# EAGLE board RatDistortion (EAGLE 9.6.2)
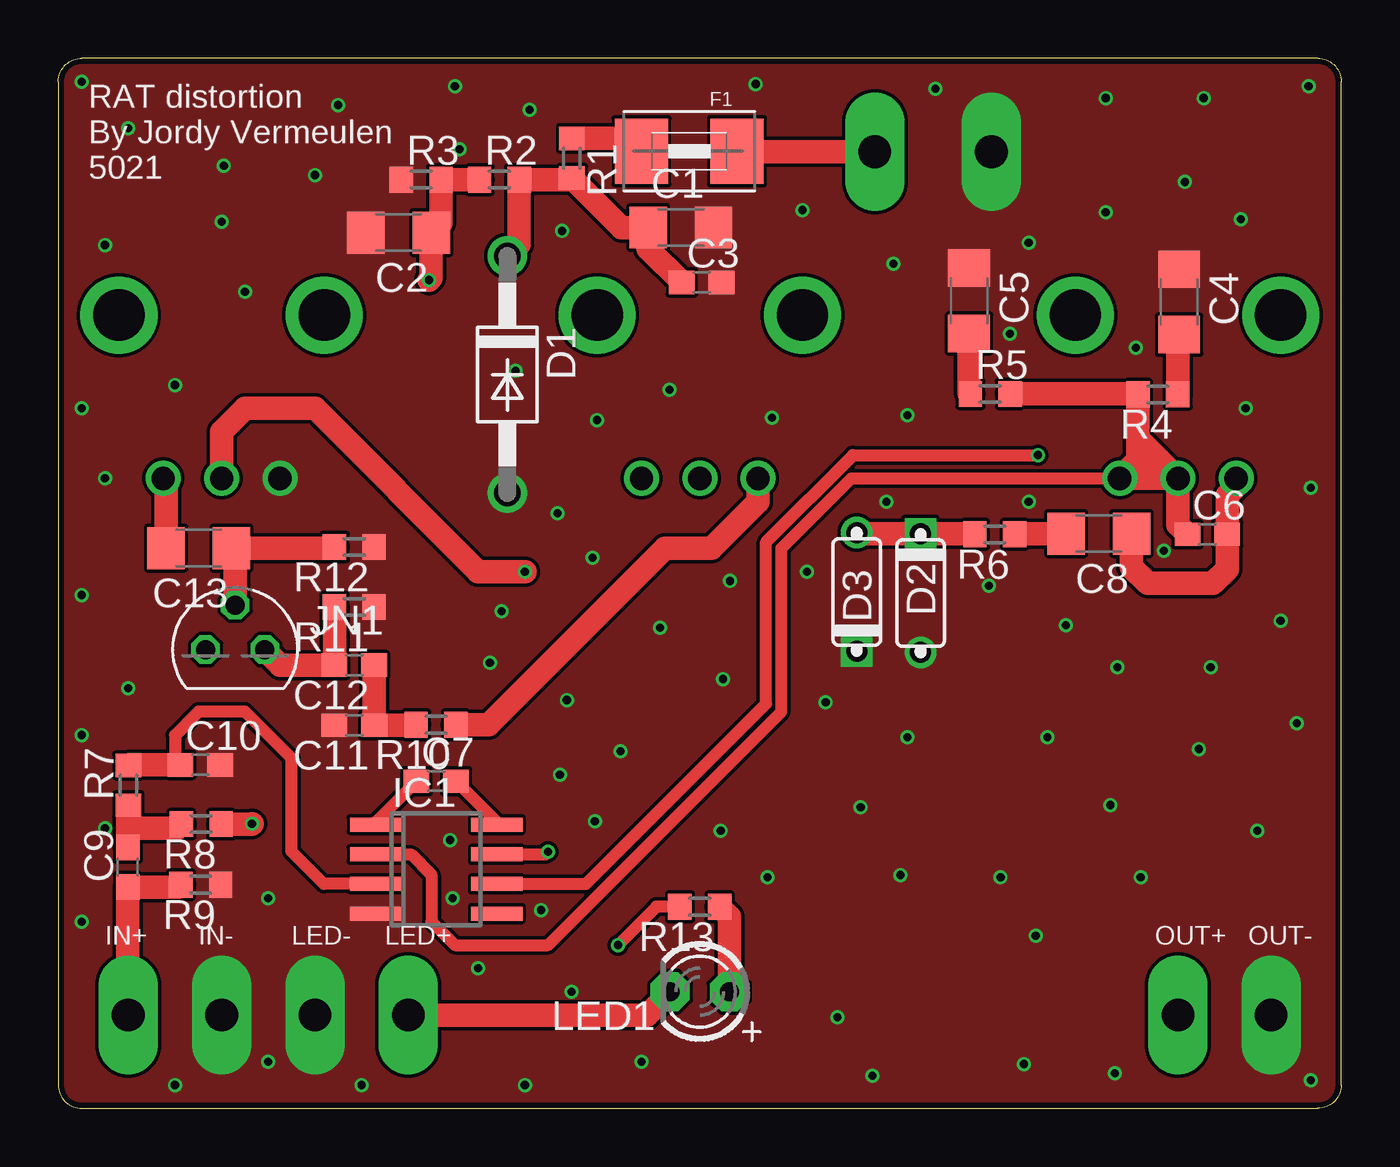
[diagram p0: board, top side]
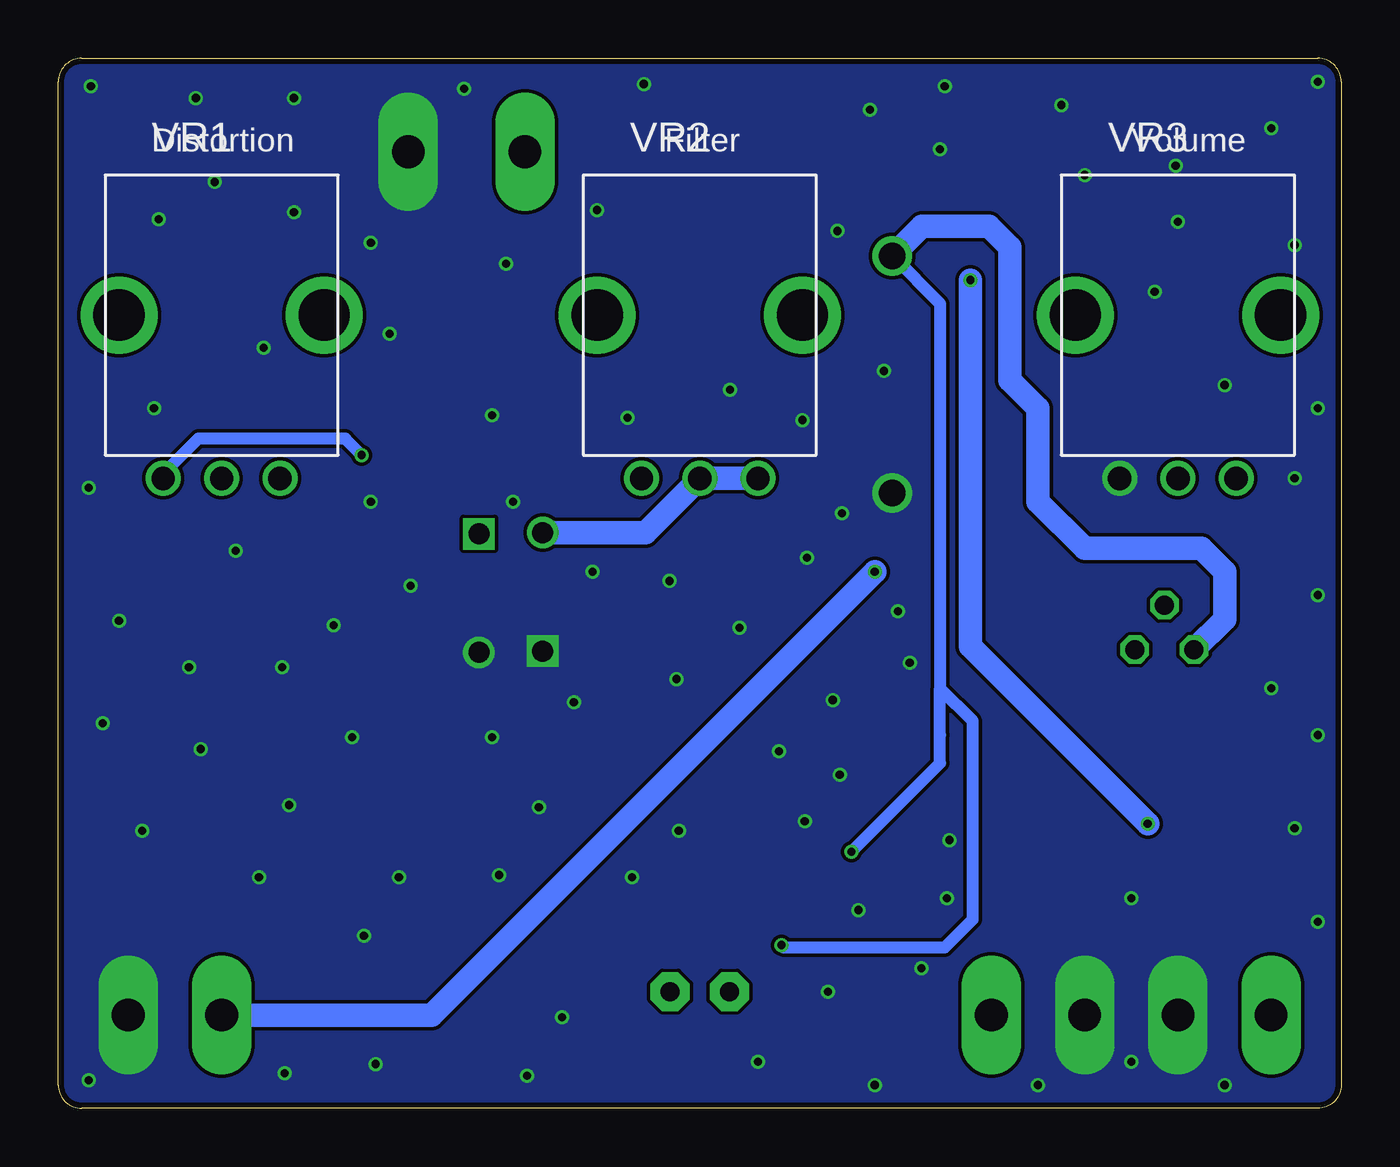
[diagram p1: board, bottom side, seen from below]

Size 55 x 45 mm. Coordinates in mm from the lower left corner, seen from the top.
Outline: 1,0 54,0 arc90 55,1 55,44 arc90 54,45 1,45 arc90 0,44 0,1 arc90 1,0
Copper layers (1*16): Top 0.018mm / dielectric 1.55mm / Bottom 0.018mm
Design rules "eC_2Layer_PClass6_BaseCopperO18_eCDefault": minimum track width 0.15mm, minimum drill 0.35mm, track to track 0.15mm, track to pad 0.15mm, pad to pad 0.15mm, via to via 0.15mm, smd to smd 0mil, copper to edge 0.25mm, drill to drill 0.35mm, minimum pad ring 0.175mm, minimum via ring 0.125mm, stop-mask expansion 0mil, vias tented up to drill 0.45mm, thermal gap 0.2mm

## Footprints (pad centres in the part's own frame; a part is rotated, then mirrored left to right if it is on the bottom)
C1206 = smd 1.6 x 1.8: 1 -1.4,0; 2 1.4,0
C0603 = smd 1.1 x 1: 1 -0.85,0; 2 0.85,0
DO41-10 = drill 1.118: A 5.08,0; C -5.08,0
DO35-2 = drill 0.9: A 2.54,0 | drill 0.9 square: C -2.54,0
1812 = smd 2.286 x 2.794: 1 -2.046,0; 2 2.046,0
SO08 = smd 0.6 x 2.2: 1 -1.905,-2.6; 2 -0.635,-2.6; 3 0.635,-2.6; 4 1.905,-2.6; 5 1.905,2.6; 6 0.635,2.6; 7 -0.635,2.6; 8 -1.905,2.6
TO92 = drill 0.813 octagon: 1 1.27,0; 2 0,1.905; 3 -1.27,0
1X1-BIGPOGO = drill 1.4 pad 2.54 long: P$1 0,0
LED3MM = drill 0.813 pad 1.676 octagon: A -1.27,0; K 1.27,0
R0603 = smd 1 x 1.1: 1 -0.85,0; 2 0.85,0
PTV09 = drill 1: 1 -2.5,0; 2 0,0; 3 2.5,0 | drill 2.2: NC1 -4.4,7; NC2 4.4,7

## Placement (x,y rotation side)
C1  100u  [C1206]  26.69,37.75 0 top
C2  1u  [C1206]  14.59,37.53 180 top
C3  0.1u  [C0603]  27.58,35.4 0 top
C4  2.2u  [C1206]  48.05,34.56 270 top
C5  4.7u  [C1206]  39.05,34.61 270 top
C6  100p  [C0603]  49.26,24.6 0 top
C7  30p  [C0603]  16.2,14.02 0 top
C8  4.7u  [C1206]  44.61,24.63 180 top
C9  22n  [C0603]  2.98,10.33 90 top
C10  1n  [C0603]  6.09,14.72 0 top
C11  3.3n  [C0603]  12.69,16.42 180 top
C12  22n  [C0603]  12.69,19 180 top
C13  1u  [C1206]  6.02,24.01 180 top
D1  1N4004  [DO41-10]  19.25,31.45 270 top
D2  1N914.2  [DO35-2]  36.97,22.08 270 top
D3  1N914.2  [DO35-2]  34.23,22.13 90 top
F1  100mA  [1812]  27.05,41.02 180 top
IC1  LM308D  [SO08]  16.2,10.25 270 top
JN1  2N5458  [TO92]  7.58,19.66 0 top
JP1  9v  [1X1-BIGPOGO]  35,41 90 top
JP2  GND  [1X1-BIGPOGO]  52,4 90 top
JP3  [1X1-BIGPOGO]  3,4 90 top
JP4  [1X1-BIGPOGO]  7,4 90 top
JP5  [1X1-BIGPOGO]  48,4 90 top
JP6  [1X1-BIGPOGO]  40,41 90 top
JP7  [1X1-BIGPOGO]  15,4 270 bottom
JP8  [1X1-BIGPOGO]  11,4 90 top
LED1  [LED3MM]  27.5,5 180 top
R1  47  [R0603]  22.02,40.72 270 top
R2  100k  [R0603]  18.91,39.8 0 top
R3  100k  [R0603]  15.56,39.8 0 top
R4  47  [R0603]  47.14,30.6 180 top
R5  560  [R0603]  39.95,30.62 0 top
R6  1k  [R0603]  40.15,24.6 180 top
R7  1k  [R0603]  3,13.84 90 top
R8  1M  [R0603]  6.13,12.18 180 top
R9  1M  [R0603]  6.11,9.58 180 top
R10  1.5k  [R0603]  16.19,16.44 180 top
R11  1M  [R0603]  12.69,21.48 180 top
R12  10k  [R0603]  12.69,24.06 180 top
R13  1k  [R0603]  27.5,8.64 180 top
VR1  PTV09A-4225F-B104  [PTV09]  48,27 0 bottom
VR2  PTV09A-4225F-B104  [PTV09]  27.5,27 0 bottom
VR3  PTV09A-4225F-B104  [PTV09]  7,27 0 bottom

## Library data of the parts
C1-C13 = rcl; SPICEPREFIX: C
D1 = diode
D2 D3 = 1N914; AVAILABILITY: In Stock; DESCRIPTION: Diode Standard 75V 200mA Surface Mount SOD-523F; MF: ON Semiconductor; MP: 1N914; PACKAGE: AXIAL LEAD-2 ON Semiconductor; PRICE: None; PURCHASE-URL: https://pricing.snapeda.com/search/part/1N914/?ref=eda
F1 JP1-JP8 LED1 = adafruit
IC1 = linear
JN1 = 2N5458; AVAILABILITY: In Stock; DESCRIPTION: JFET N-Channel 25 V 310 mW Through Hole TO-92 (TO-226); MF: ON Semiconductor; MP: 2N5458; PACKAGE: E-PKG AXIAL-LEADED-2 ON Semiconductor; PRICE: None
R1-R13 = rcl; SPICEPREFIX: R
VR1-VR3 = PTV09A-4225F-B104; AVAILABILITY: In Stock; DESCRIPTION: 100k Ohm 1 Gang Linear Through Hole, Snap In Potentiometer Detent 1.0 Kierros Carbon 0.05W, 1/20W PC Pins, Board Locks; MF: Bourns; MP: PTV09A-4225F-B104; PACKAGE: None; PRICE: None; PURCHASE-URL: https://pricing.snapeda.com/search/part/PTV09A-4225F-B104/?ref=eda

## Nets
4.5V: C2.1 R2.1 R3.2 R8.1
9V: C1.1 C3.1 D1.C IC1.7 JN1.3 R1.2 R2.2 R13.2
GND: C1.2 C2.2 C3.2 C4.1 C5.1 C10.2 C11.2 D1.A D2.A D3.C IC1.4 JP2.P$1 JP4.P$1 JP6.P$1 JP8.P$1 R3.1 R9.1 R11.1 R12.1 VR3.1
N$1: F1.2 R1.1
N$2: F1.1 JP1.P$1
N$3: C4.2 R4.1
N$4: C5.2 R5.1
N$5: C6.1 IC1.2 R4.2 R5.2 VR1.2 VR1.3
N$6: C6.2 C8.1 IC1.6 VR1.1
N$7: C8.2 R6.1
N$8: C12.2 JN1.1 R11.2
N$9: C7.1 IC1.1
N$10: C7.2 IC1.8
N$12: C10.1 IC1.3 R7.2
N$13: C9.2 R7.1 R8.2
N$14: C9.1 JP3.P$1 R9.2
N$16: R10.1 VR2.1
N$17: C13.1 JN1.2 R12.2
N$18: C13.2 VR3.3
N$19: LED1.A R13.1
N$20: JP5.P$1 VR3.2
N$21: JP7.P$1 LED1.K
OUTSTAGE: C11.1 C12.1 R10.2
TONE: D2.C D3.A R6.2 VR2.2 VR2.3

## Tracks (layer width: path | path; a pad name or v marks a point on that pad's centre or on a via)
4.5V  (via drill 0.35)
  Top 1.016: R2.1 R3.2 16.41,37.95 C2.1 15.99,35.59 v15.9,35.5 | R8.1 8.28,12.18 v8.3,12.2
  Bottom 1.016: v8.3,12.2 15.9,19.8 v15.9,35.5
9V  (via drill 0.35)
  Top 0.508: R13.2 25.64,8.64 v24,7 | IC1.7 20.89,10.88 v21,11
  Top 1.016: D1.C 19.76,37.04 R2.2 21.95,39.8 R1.2 24.14,37.75 C1.1 25.29,36.84 C3.1
  Bottom 0.508: v24,7 23.9,6.9 17,6.9 15.8,8.1 15.8,16.6 17.2,18 | D1.C 17.2,34.48 17.2,18 | v21,11 17.2,14.8 17.2,16 17.2,18
  Bottom 1.016: JN1.3 5,20.97 5,23 6,24 11,24 13,26 13,30 14.2,31.2 14.2,36.9 15.1,37.8 17.98,37.8 D1.C
GND  (via drill 0.35)
  other vias: 1,44 3,42 12,43 7,38 2,37 11,40 8,35 5,31 1,30 2,27 1,22 3,18 1,8 1,16 2,12 9,9 9,2 5,1 13,1 22,5 20,1 25,2 18,6 20.7,8.5 16.8,11.5 21.8,17.5 24.1,15.3 21.5,14.3 23,12.3 19,21.3 18.5,19.1 16.9,9 28.8,22.6 25.8,20.6 28.5,18.4 21.4,25.5 22.9,23.6 26.2,30.8 19.6,31.6 21.6,37.6 30.6,29.6 23.1,29.5 31.9,38.5 36.4,29.7 35.8,36.2 37.6,43.7 29.9,43.9 20.2,42.8 17,43.8 17.2,41.1 53.6,43.8 44.9,43.3 44.9,38.4 41.6,37.1 40.8,33.2 46.2,32.6 50.9,30 50.7,38.1 48.3,39.7 53.7,26.6 43.2,20.7 35.5,26 41.6,26 47.4,23.9 36.4,15.9 49.4,18.9 42.4,15.9 45.4,18.9 51.4,11.9 46.4,9.9 52.4,20.9 40.4,9.9 34.4,12.9 33.4,3.9 41.4,1.9 30.4,9.9 28.4,11.9 53.7,1.2 45.3,1.5 34.9,1.4 41.9,7.4 48.9,15.4 39.9,22.4 32.9,17.4 32.1,23 45.1,13 36.1,10 7.1,40.4 53.1,16.5 49.1,43.3
  pour Top (no thermals): 0,45 0,0 55,0 55,45
  pour Bottom (no thermals): 0,45 0,0 55,0 55,45
N$1
  Top 1.016: F1.2 24.45,41.57 R1.1
N$2
  Top 1.016: F1.1 29.12,41 JP1.P$1
N$3
  Top 1.016: R4.1 47.99,33.1 C4.2
N$4
  Top 1.016: R5.1 39.05,30.67 C5.2
N$5
  Top 0.508: IC1.2 15.12,10.88 16,10 16,8 17,7 21,7 31,17 31,24 34,27 VR1.3
  Top 1.016: 46.29,28.71 R4.2 46.27,30.62 R5.2 | 46.29,28.71 46.29,27.79 | 46.29,27.79 VR1.3 VR1.2 | VR1.2 47.21,27.79 | 47.21,27.79 46.29,27.79 | 47.21,27.79 46.29,28.71 | C6.1 48,25.01 VR1.2
N$6  (via drill 0.35)
  Top 0.508: IC1.6 22.61,9.62 30.34,17.34 30.34,24.27 34.07,28 v42,28
  Top 1.016: VR1.1 50.67,26.83 50.11,26.27 C6.2 50.11,23.11 49.5,22.5 46.7,22.5 46.01,23.19 C8.1
  Bottom 0.508: VR1.1 50.5,27.2 49,28.7 42.7,28.7 v42,28
N$7
  Top 1.016: R6.1 41.03,24.63 C8.2
N$8
  Top 1.016: R11.2 C12.2 9.51,19 JN1.1
N$9
  Top 0.508: C7.1 13.6,12.27 IC1.1
N$10
  Top 0.508: C7.2 18.8,12.27 IC1.8
N$12
  Top 0.508: IC1.3 11.38,9.62 10,11 10,15 8,17 6,17 5,16 5,14.96 C10.1
  Top 1.016: R7.2 3.03,14.72 C10.1
N$13
  Top 1.016: C9.2 2.98,12 | 2.98,12 2.98,12.97 R7.1 | R8.2 5.1,12 2.98,12
N$14
  Top 1.016: JP3.P$1 2.98,4.02 C9.1 5.16,9.48 R9.2
N$16
  Top 1.016: R10.1 18.44,16.44 26,24 28,24 30,26 VR2.1
N$17
  Top 1.016: JN1.2 7.58,23.85 C13.1 11.79,24.01 R12.2
N$18
  Top 1.016: C13.2 4.62,26.88 VR3.3
N$19
  Top 1.016: LED1.A 28.77,8.22 R13.1
N$20  (via drill 0.35)
  Top 1.016: v20,23 18,23 11,30 8,30 7,29 VR3.2
  Bottom 1.016: JP5.P$1 39,4 v20,23
N$21
  Top 1.016: LED1.K 25.23,4 JP7.P$1
OUTSTAGE
  Top 1.016: C12.1 C11.1 15.32,16.42 R10.2
TONE
  Top 1.016: D3.A 34.28,24.62 D2.C 39.28,24.62 R6.2
  Bottom 1.016: VR2.3 VR2.2 29.83,24.67 D3.A

## Text on the board
tPlace: RAT distortion / By Jordy Vermeulen / 5021 | IN+ | IN- | LED- | LED+ | OUT+ | OUT-
bPlace: Volume | Filter | Distortion
Measures: inside | outside
Document: Signature